# EAGLE board fc-carrier (EAGLE 5.10), part 1 of 2
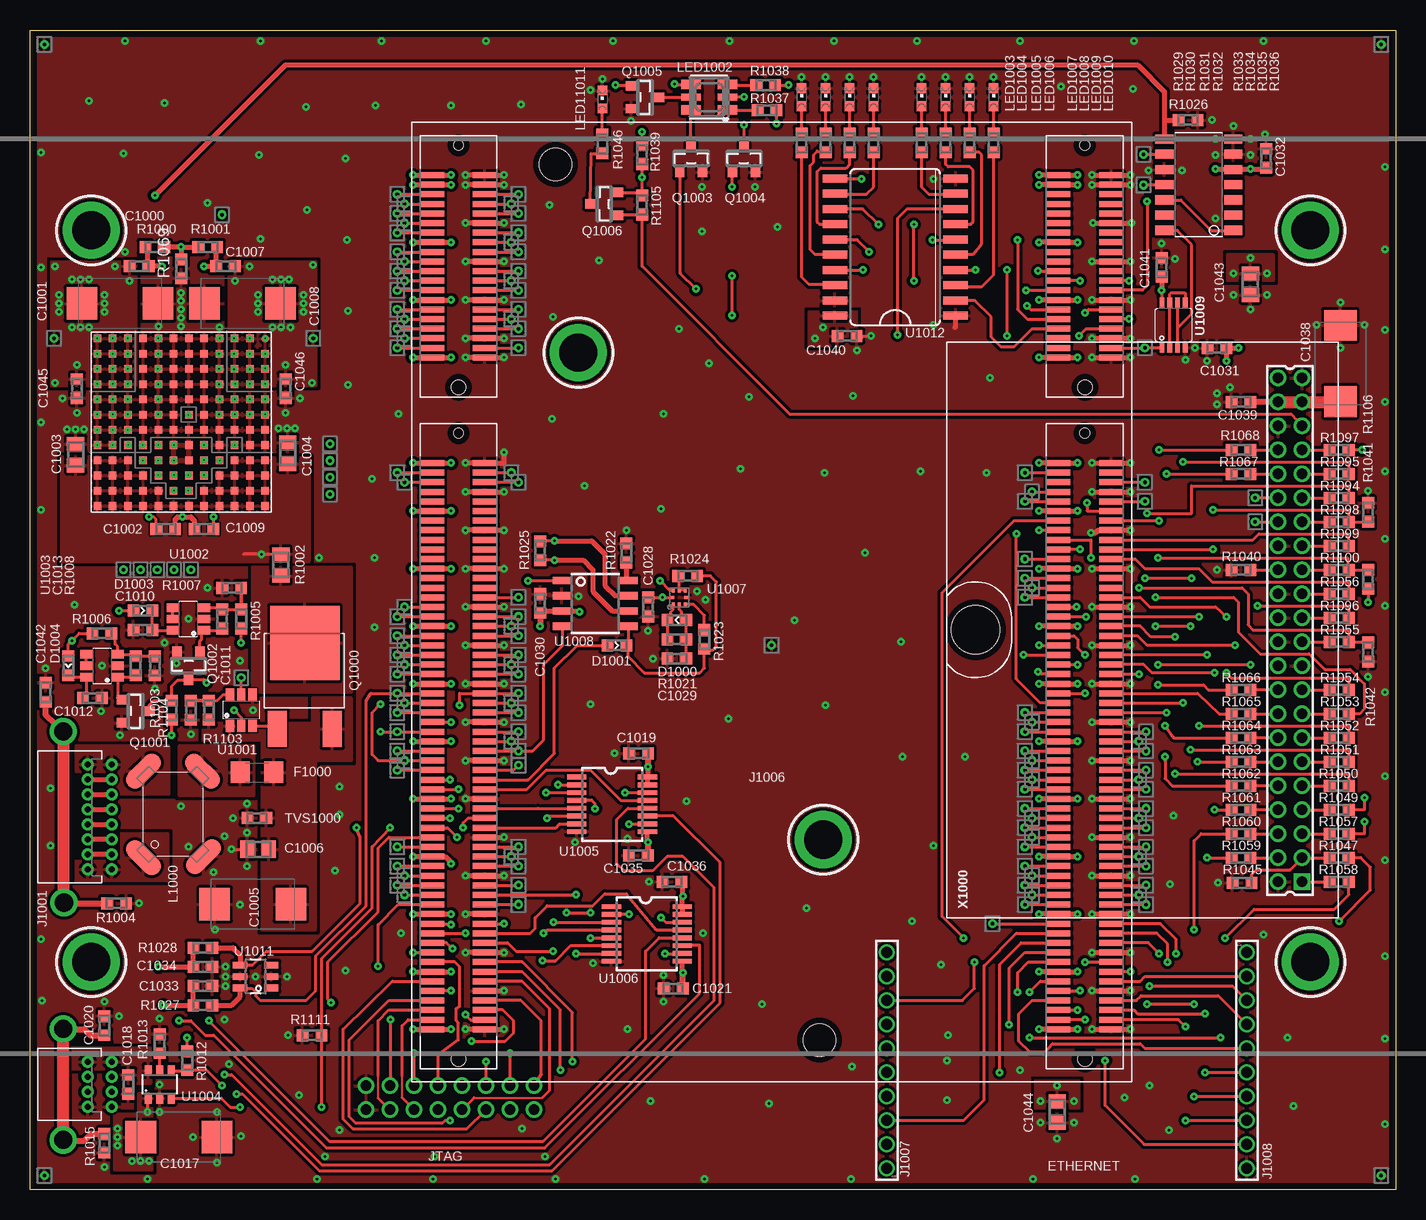
[diagram p0: board, top side]
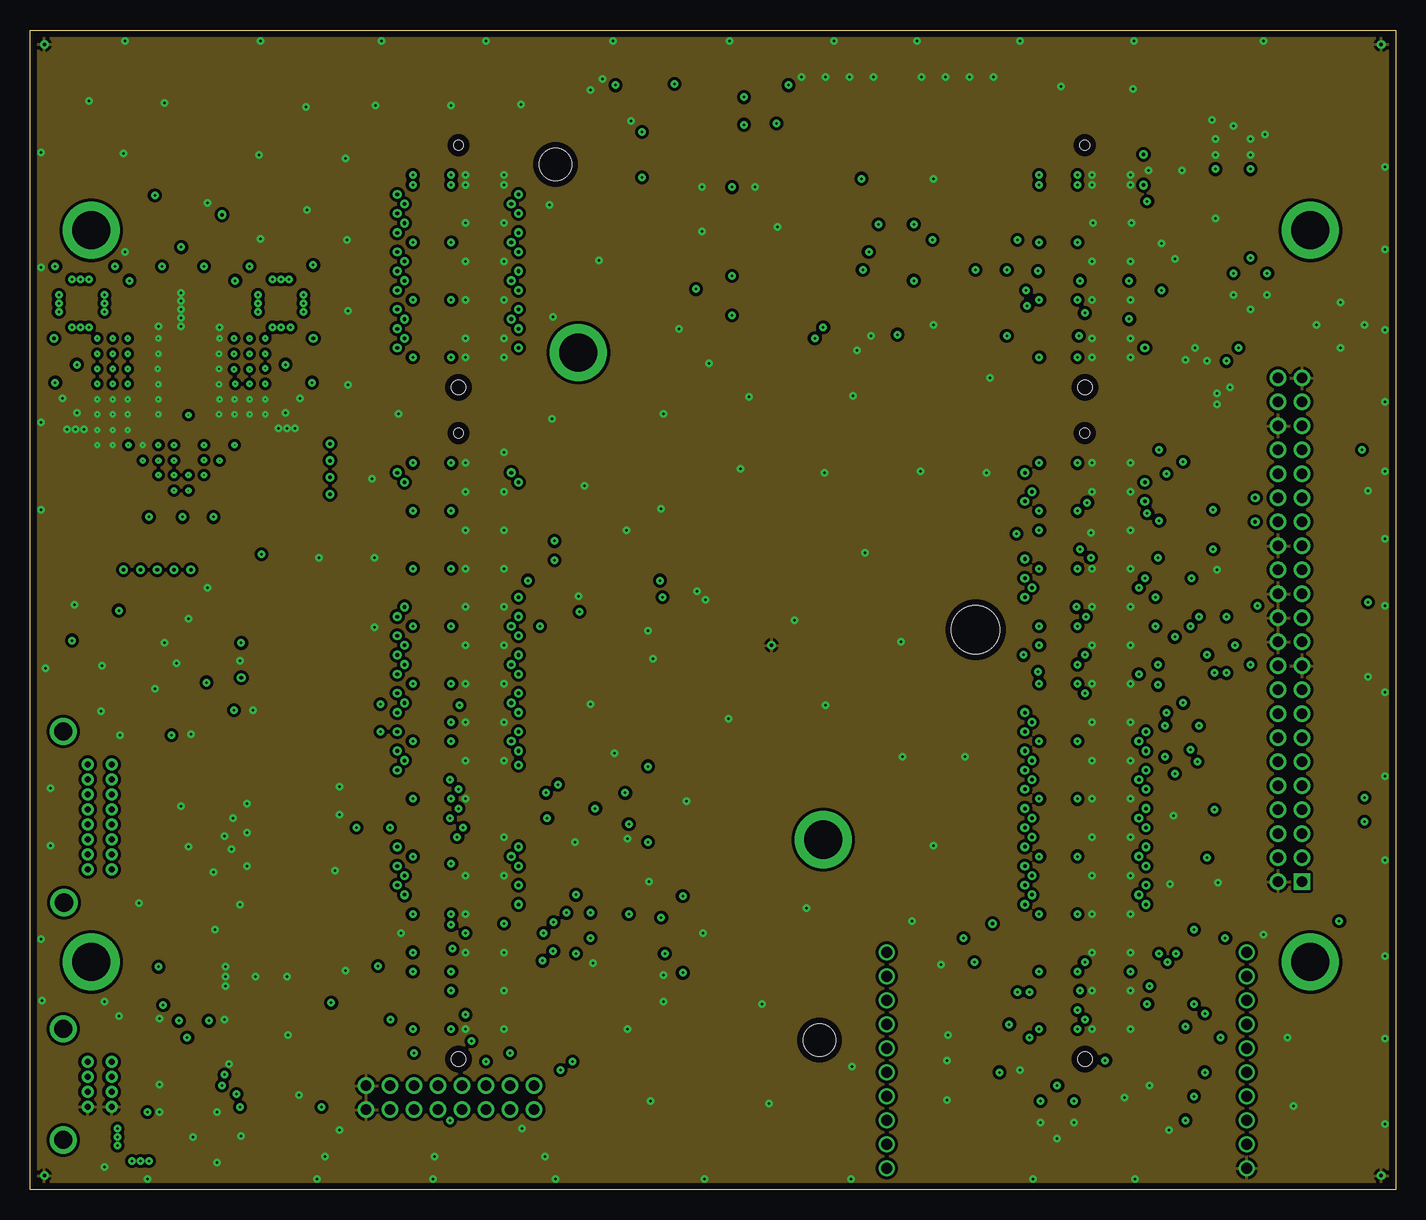
[diagram p1: board, inner layer Route2]
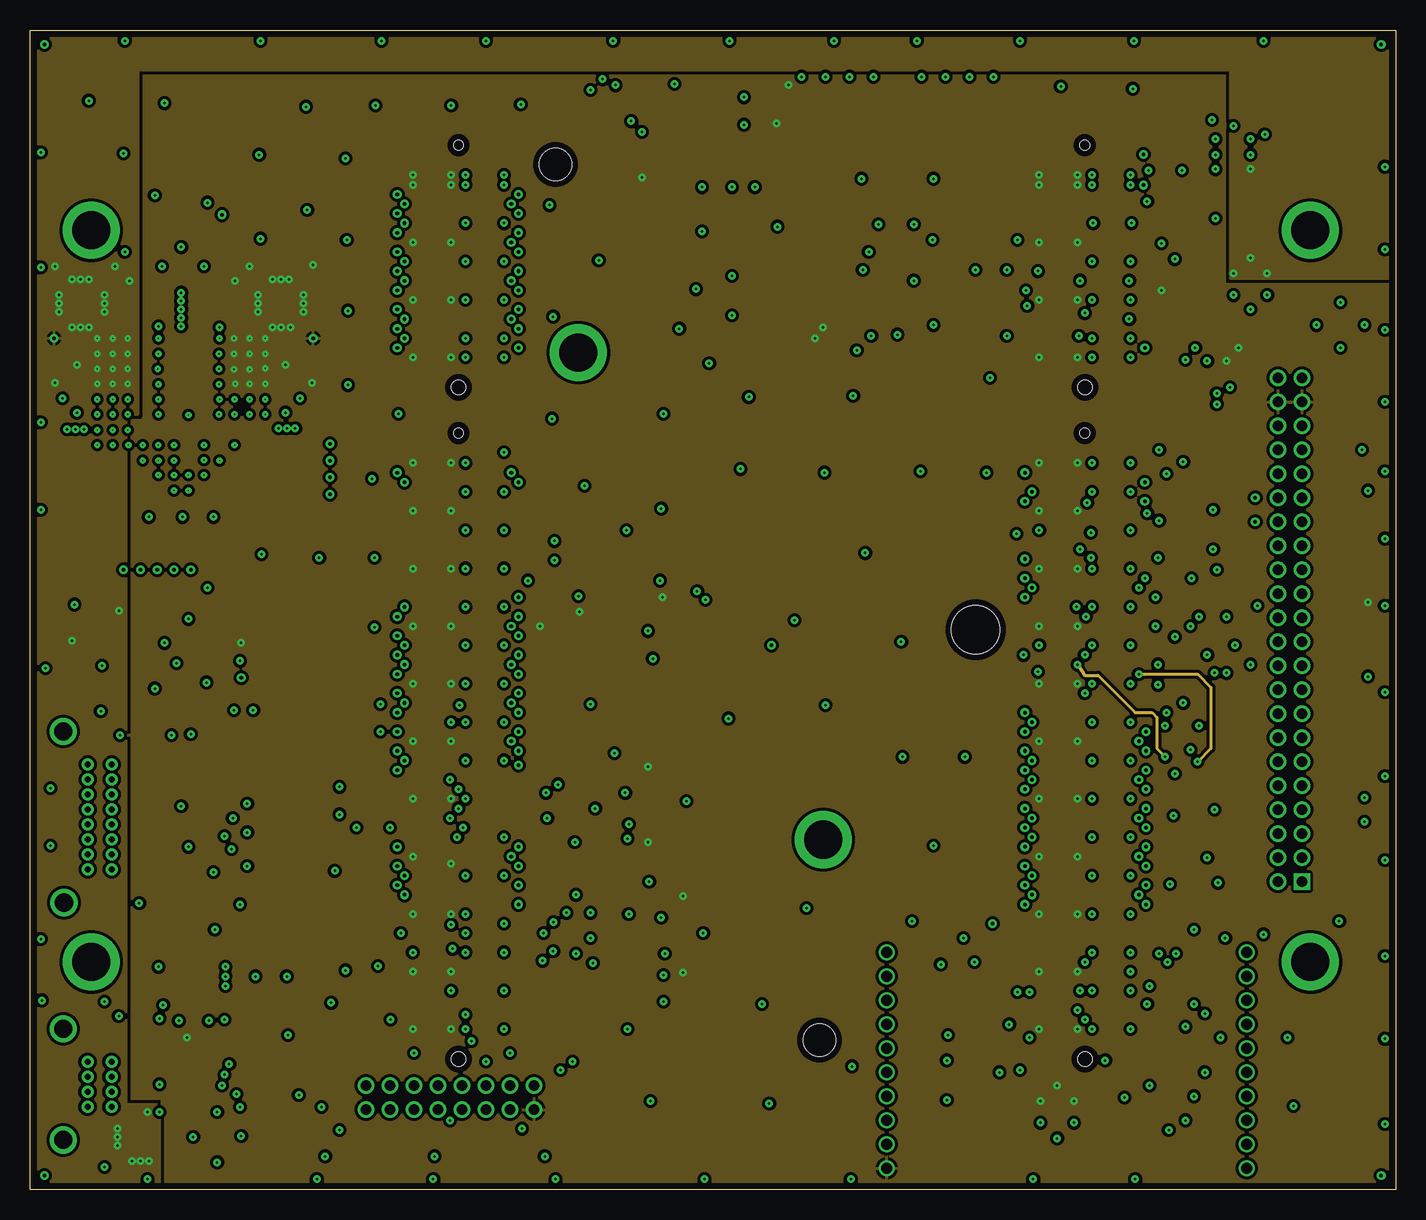
[diagram p2: board, inner layer Route3]
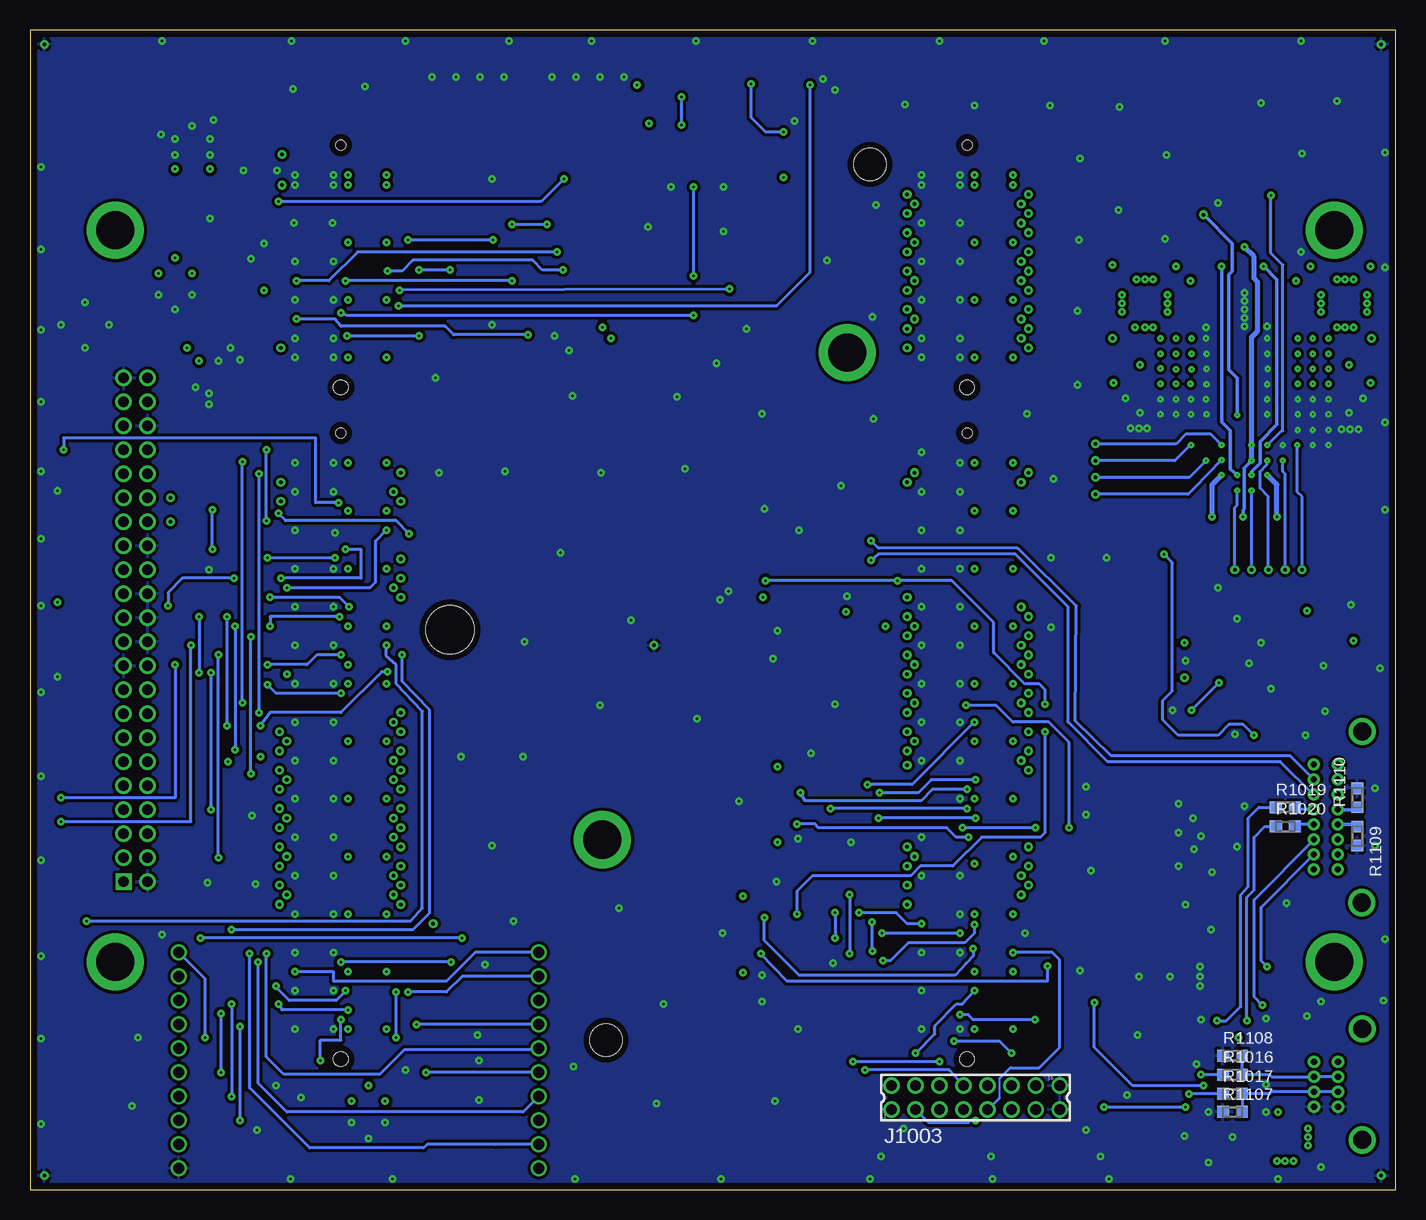
[diagram p3: board, bottom side, seen from below]

Size 113.8 x 96.7 mm. Coordinates in mm from the lower left corner, seen from the top.
Outline: 0,96.7 113.8,96.7 113.8,0 0,0 0,96.7
Copper layers (1+2*3+16): Top 0.0432mm / dielectric 0.3048mm / Route2 0.0356mm / dielectric 0.7112mm / Route3 0.0356mm / dielectric 0.3048mm / Bottom 0.0432mm
Design rules "sunstone_4lr_rules_v1.3_modifid": minimum track width 6mil, minimum drill 8mil, track to track 6mil, track to pad 6mil, pad to pad 6mil, via to via 6mil, smd to smd 6mil, copper to edge 20mil, drill to drill 16mil, minimum pad ring 0.2118mm, minimum via ring 0.2118mm, stop-mask expansion 3mil, vias tented up to drill 0mil, thermal gap 10mil
tRestrict: 10 lines

## Footprints (pad centres in the part's own frame; a part is rotated, then mirrored left to right if it is on the bottom)
0603-B-NOSILK = smd 0.95 x 1: 1 -0.8,0; 2 0.8,0
D/7343-31R = smd 2.55 x 2.7: + 3.175,0; - -3.175,0
0805-B-NOSILK = smd 1.15 x 1.45: 1 -0.9,0; 2 0.9,0
0603-B-NOSILK-DIODE = smd 0.95 x 1: ANODE -0.8,0; CATHODE 0.8,0
1206 = smd 1.6 x 1.8: 1 -1.4,0; 2 1.4,0
ROCKETBUS-PKG = drill 0.508 pad 1.016 round: AUX_1@1 0,-1.875; AUX_1@2 2,-1.875; AUX_2@1 0,-3.125; AUX_2@2 2,-3.125; B+@1 0,4.375; B+@2 2,4.375; B-@1 0,-4.375; B-@2 2,-4.375; CAN_H@1 0,3.125; CAN_H@2 2,3.125; CAN_L@1 0,1.875; CAN_L@2 2,1.875; USB_H@1 0,0.625; USB_H@2 2,0.625; USB_L@1 0,-0.625; USB_L@2 2,-0.625 | drill 1.511 round: CHASSIS@1 -2.032,7.136; CHASSIS@2 -1.982,-7.136
USB-CONNECTOR-PKG = drill 0.508 pad 1.016 round: B+@1 2,1.875; B+@2 0,1.875; B-@7 2,-1.875; B-@8 0,-1.875; USB_H@3 2,0.625; USB_H@4 0,0.625; USB_L@5 2,-0.625; USB_L@6 0,-0.625 | drill 1.511 round: CHASSIS@1 -2.032,4.636; CHASSIS@2 -2.032,-4.636
87758-1616 = drill 0.9 pad 1.27 round: 1 -7,-1; 2 -7,1; 3 -5,-1; 4 -5,1; 5 -3,-1; 6 -3,1; 7 -1,-1; 8 -1,1; 9 1,-1; 10 1,1; 11 3,-1; 12 3,1; 13 5,-1; 14 5,1; 15 7,-1; 16 7,1
TQM = smd 0.5 x 2: X1_1 -35.6,-23.9; X1_2 -35.6,-28.3; X1_3 -34.8,-23.9; X1_4 -34.8,-28.3; X1_5 -34,-23.9; X1_6 -34,-28.3; X1_7 -33.2,-23.9; X1_8 -33.2,-28.3; X1_9 -32.4,-23.9; X1_10 -32.4,-28.3; X1_11 -31.6,-23.9; X1_12 -31.6,-28.3; X1_13 -30.8,-23.9; X1_14 -30.8,-28.3; X1_15 -30,-23.9; X1_16 -30,-28.3; X1_17 -29.2,-23.9; X1_18 -29.2,-28.3; X1_19 -28.4,-23.9; X1_20 -28.4,-28.3; X1_21 -27.6,-23.9; X1_22 -27.6,-28.3; X1_23 -26.8,-23.9; X1_24 -26.8,-28.3; X1_25 -26,-23.9; X1_26 -26,-28.3; X1_27 -25.2,-23.9; X1_28 -25.2,-28.3; X1_29 -24.4,-23.9; X1_30 -24.4,-28.3; X1_31 -23.6,-23.9; X1_32 -23.6,-28.3; X1_33 -22.8,-23.9; X1_34 -22.8,-28.3; X1_35 -22,-23.9; X1_36 -22,-28.3; X1_37 -21.2,-23.9; X1_38 -21.2,-28.3; X1_39 -20.4,-23.9; X1_40 -20.4,-28.3; X1_41 -19.6,-23.9; X1_42 -19.6,-28.3; X1_43 -18.8,-23.9; X1_44 -18.8,-28.3; X1_45 -18,-23.9; X1_46 -18,-28.3; X1_47 -17.2,-23.9; X1_48 -17.2,-28.3; X1_49 -16.4,-23.9; X1_50 -16.4,-28.3; X1_51 -15.6,-23.9; X1_52 -15.6,-28.3; X1_53 -14.8,-23.9; X1_54 -14.8,-28.3; X1_55 -14,-23.9; X1_56 -14,-28.3; X1_57 -13.2,-23.9; X1_58 -13.2,-28.3; X1_59 -12.4,-23.9; X1_60 -12.4,-28.3; X1_61 -11.6,-23.9; X1_62 -11.6,-28.3; X1_63 -10.8,-23.9; X1_64 -10.8,-28.3; X1_65 -10,-23.9; X1_66 -10,-28.3; X1_67 -9.2,-23.9; X1_68 -9.2,-28.3; X1_69 -8.4,-23.9; X1_70 -8.4,-28.3; X1_71 -7.6,-23.9; X1_72 -7.6,-28.3; X1_73 -6.8,-23.9; X1_74 -6.8,-28.3; X1_75 -6,-23.9; X1_76 -6,-28.3; X1_77 -5.2,-23.9; X1_78 -5.2,-28.3; X1_79 -4.4,-23.9; X1_80 -4.4,-28.3; X1_81 -3.6,-23.9; X1_82 -3.6,-28.3; X1_83 -2.8,-23.9; X1_84 -2.8,-28.3; X1_85 -2,-23.9; X1_86 -2,-28.3; X1_87 -1.2,-23.9; X1_88 -1.2,-28.3; X1_89 -0.4,-23.9; X1_90 -0.4,-28.3; X1_91 0.4,-23.9; X1_92 0.4,-28.3; X1_93 1.2,-23.9; X1_94 1.2,-28.3; X1_95 2,-23.9; X1_96 2,-28.3; X1_97 2.8,-23.9; X1_98 2.8,-28.3; X1_99 3.6,-23.9; X1_100 3.6,-28.3; X1_101 4.4,-23.9; X1_102 4.4,-28.3; X1_103 5.2,-23.9; X1_104 5.2,-28.3; X1_105 6,-23.9; X1_106 6,-28.3; X1_107 6.8,-23.9; X1_108 6.8,-28.3; X1_109 7.6,-23.9; X1_110 7.6,-28.3; X1_111 8.4,-23.9; X1_112 8.4,-28.3; X1_113 9.2,-23.9; X1_114 9.2,-28.3; X1_115 10,-23.9; X1_116 10,-28.3; X1_117 10.8,-23.9; X1_118 10.8,-28.3; X1_119 11.6,-23.9; X1_120 11.6,-28.3; X2_1 20.4,-23.9; X2_2 20.4,-28.3; X2_3 21.2,-23.9; X2_4 21.2,-28.3; X2_5 22,-23.9; X2_6 22,-28.3; X2_7 22.8,-23.9; X2_8 22.8,-28.3; X2_9 23.6,-23.9; X2_10 23.6,-28.3; X2_11 24.4,-23.9; X2_12 24.4,-28.3; X2_13 25.2,-23.9; X2_14 25.2,-28.3; X2_15 26,-23.9; X2_16 26,-28.3; X2_17 26.8,-23.9; X2_18 26.8,-28.3; X2_19 27.6,-23.9; X2_20 27.6,-28.3; X2_21 28.4,-23.9; X2_22 28.4,-28.3; X2_23 29.2,-23.9; X2_24 29.2,-28.3; X2_25 30,-23.9; X2_26 30,-28.3; X2_27 30.8,-23.9; X2_28 30.8,-28.3; X2_29 31.6,-23.9; X2_30 31.6,-28.3; X2_31 32.4,-23.9; X2_32 32.4,-28.3; X2_33 33.2,-23.9; X2_34 33.2,-28.3; X2_35 34,-23.9; X2_36 34,-28.3; X2_37 34.8,-23.9; X2_38 34.8,-28.3; X2_39 35.6,-23.9; X2_40 35.6,-28.3; X3_1 -35.6,28.3; X3_2 -35.6,23.9; X3_3 -34.8,28.3; X3_4 -34.8,23.9; X3_5 -34,28.3; X3_6 -34,23.9; X3_7 -33.2,28.3; X3_8 -33.2,23.9; X3_9 -32.4,28.3; X3_10 -32.4,23.9; X3_11 -31.6,28.3; X3_12 -31.6,23.9; X3_13 -30.8,28.3; X3_14 -30.8,23.9; X3_15 -30,28.3; X3_16 -30,23.9; X3_17 -29.2,28.3; X3_18 -29.2,23.9; X3_19 -28.4,28.3; X3_20 -28.4,23.9; X3_21 -27.6,28.3; X3_22 -27.6,23.9; X3_23 -26.8,28.3; X3_24 -26.8,23.9; X3_25 -26,28.3; X3_26 -26,23.9; X3_27 -25.2,28.3; X3_28 -25.2,23.9; X3_29 -24.4,28.3; X3_30 -24.4,23.9; X3_31 -23.6,28.3; X3_32 -23.6,23.9; X3_33 -22.8,28.3; X3_34 -22.8,23.9; X3_35 -22,28.3; X3_36 -22,23.9; X3_37 -21.2,28.3; X3_38 -21.2,23.9; X3_39 -20.4,28.3; X3_40 -20.4,23.9; X3_41 -19.6,28.3; X3_42 -19.6,23.9; X3_43 -18.8,28.3; X3_44 -18.8,23.9; X3_45 -18,28.3; X3_46 -18,23.9; X3_47 -17.2,28.3; X3_48 -17.2,23.9; X3_49 -16.4,28.3; X3_50 -16.4,23.9; X3_51 -15.6,28.3; X3_52 -15.6,23.9; X3_53 -14.8,28.3; X3_54 -14.8,23.9; X3_55 -14,28.3; X3_56 -14,23.9; X3_57 -13.2,28.3; X3_58 -13.2,23.9; X3_59 -12.4,28.3; X3_60 -12.4,23.9; X3_61 -11.6,28.3; X3_62 -11.6,23.9; X3_63 -10.8,28.3; X3_64 -10.8,23.9; X3_65 -10,28.3; X3_66 -10,23.9; X3_67 -9.2,28.3; X3_68 -9.2,23.9; X3_69 -8.4,28.3; X3_70 -8.4,23.9; X3_71 -7.6,28.3; X3_72 -7.6,23.9; X3_73 -6.8,28.3; X3_74 -6.8,23.9; X3_75 -6,28.3; X3_76 -6,23.9; X3_77 -5.2,28.3; X3_78 -5.2,23.9; X3_79 -4.4,28.3; X3_80 -4.4,23.9; X3_81 -3.6,28.3; X3_82 -3.6,23.9; X3_83 -2.8,28.3; X3_84 -2.8,23.9; X3_85 -2,28.3; X3_86 -2,23.9; X3_87 -1.2,28.3; X3_88 -1.2,23.9; X3_89 -0.4,28.3; X3_90 -0.4,23.9; X3_91 0.4,28.3; X3_92 0.4,23.9; X3_93 1.2,28.3; X3_94 1.2,23.9; X3_95 2,28.3; X3_96 2,23.9; X3_97 2.8,28.3; X3_98 2.8,23.9; X3_99 3.6,28.3; X3_100 3.6,23.9; X3_101 4.4,28.3; X3_102 4.4,23.9; X3_103 5.2,28.3; X3_104 5.2,23.9; X3_105 6,28.3; X3_106 6,23.9; X3_107 6.8,28.3; X3_108 6.8,23.9; X3_109 7.6,28.3; X3_110 7.6,23.9; X3_111 8.4,28.3; X3_112 8.4,23.9; X3_113 9.2,28.3; X3_114 9.2,23.9; X3_115 10,28.3; X3_116 10,23.9; X3_117 10.8,28.3; X3_118 10.8,23.9; X3_119 11.6,28.3; X3_120 11.6,23.9; X4_1 20.4,28.3; X4_2 20.4,23.9; X4_3 21.2,28.3; X4_4 21.2,23.9; X4_5 22,28.3; X4_6 22,23.9; X4_7 22.8,28.3; X4_8 22.8,23.9; X4_9 23.6,28.3; X4_10 23.6,23.9; X4_11 24.4,28.3; X4_12 24.4,23.9; X4_13 25.2,28.3; X4_14 25.2,23.9; X4_15 26,28.3; X4_16 26,23.9; X4_17 26.8,28.3; X4_18 26.8,23.9; X4_19 27.6,28.3; X4_20 27.6,23.9; X4_21 28.4,28.3; X4_22 28.4,23.9; X4_23 29.2,28.3; X4_24 29.2,23.9; X4_25 30,28.3; X4_26 30,23.9; X4_27 30.8,28.3; X4_28 30.8,23.9; X4_29 31.6,28.3; X4_30 31.6,23.9; X4_31 32.4,28.3; X4_32 32.4,23.9; X4_33 33.2,28.3; X4_34 33.2,23.9; X4_35 34,28.3; X4_36 34,23.9; X4_37 34.8,28.3; X4_38 34.8,23.9; X4_39 35.6,28.3; X4_40 35.6,23.9 | hole 1.2: 17.9,-26.1; 17.9,26.1; -38.1,-26.1; -38.1,26.1 | hole 0.8: 38.1,-26.1; 38.1,26.1; 14.1,-26.1; 14.1,26.1 | hole 2.7: -36.5,-4; 36.5,18
1_10_CON = drill 0.9 pad 1.27 round: 1 -9,0; 2 -7,0; 3 -5,0; 4 -3,0; 5 -1,0; 6 1,0; 7 3,0; 8 5,0; 9 7,0; 10 9,0
CMS1 = smd 3.5 x 1.5 rotated 45: 1 3.608,-2.462; 3 -3.608,2.462 | smd 3.5 x 1.5 rotated 315: 2 3.508,2.562; 4 -3.608,-2.462
PLCC-6 = smd 1.65 x 0.8: 1 -1.525,1.05; 3 -1.525,-1.05; 4 1.525,-1.05; 6 1.525,1.05 | smd 1.65 x 0.6: 2 -1.525,0; 5 1.525,0
CHIPLED_0603 = smd 0.8 x 0.8: A 0,-0.75; C 0,0.75
#4/.225-PAD+HEAD_OR_SMALL_NUT = drill 3.175 round: MT 0,0
DPAK-ZETEX = smd 6.2 x 5.8: DRAIN 0,0 | smd 3 x 1.6: GATE 7.18,-2.29; SOURCE 7.18,2.29
SOT23 = smd 0.787 x 0.889: 1 -0.953,-1.143; 2 0.953,-1.143; 3 0,1.143
TEST = drill 0.3 round: P$1 0,0
LT4619 = smd 0.63 x 0.63: A1 -6.985,-6.985; A2 -5.715,-6.985; A3 -4.445,-6.985; A4 -3.175,-6.985; A5 -1.905,-6.985; A6 -0.635,-6.985; A7 0.635,-6.985; A8 1.905,-6.985; A9 3.175,-6.985; A10 4.445,-6.985; A11 5.715,-6.985; A12 6.985,-6.985; B1 -6.985,-5.715; B2 -5.715,-5.715; B3 -4.445,-5.715; B4 -3.175,-5.715; B5 -1.905,-5.715; B6 -0.635,-5.715; B7 0.635,-5.715; B8 1.905,-5.715; B9 3.175,-5.715; B10 4.445,-5.715; B11 5.715,-5.715; B12 6.985,-5.715; C1 -6.985,-4.445; C2 -5.715,-4.445; C3 -4.445,-4.445; C4 -3.175,-4.445; C5 -1.905,-4.445; C6 -0.635,-4.445; C7 0.635,-4.445; C8 1.905,-4.445; C9 3.175,-4.445; C10 4.445,-4.445; C11 5.715,-4.445; C12 6.985,-4.445; D1 -6.985,-3.175; D2 -5.715,-3.175; D3 -4.445,-3.175; D4 -3.175,-3.175; D5 -1.905,-3.175; D6 -0.635,-3.175; D7 0.635,-3.175; D8 1.905,-3.175; D9 3.175,-3.175; D10 4.445,-3.175; D11 5.715,-3.175; D12 6.985,-3.175; E1 -6.985,-1.905; E2 -5.715,-1.905; E3 -4.445,-1.905; E4 -3.175,-1.905; E5 -1.905,-1.905; E6 -0.635,-1.905; E7 0.635,-1.905; E8 1.905,-1.905; E9 3.175,-1.905; E10 4.445,-1.905; E11 5.715,-1.905; E12 6.985,-1.905; F1 -6.985,-0.635; F2 -5.715,-0.635; F3 -4.445,-0.635; F4 -3.175,-0.635; F5 -1.905,-0.635; F6 -0.635,-0.635; F7 0.635,-0.635; F8 1.905,-0.635; F9 3.175,-0.635; F10 4.445,-0.635; F11 5.715,-0.635; F12 6.985,-0.635; G1 -6.985,0.635; G2 -5.715,0.635; G3 -4.445,0.635; G4 -3.175,0.635; G5 -1.905,0.635; G6 -0.635,0.635; G7 0.635,0.635; G8 1.905,0.635; G9 3.175,0.635; G10 4.445,0.635; G11 5.715,0.635; G12 6.985,0.635; H1 -6.985,1.905; H2 -5.715,1.905; H3 -4.445,1.905; H4 -3.175,1.905; H5 -1.905,1.905; H6 -0.635,1.905; H7 0.635,1.905; H8 1.905,1.905; H9 3.175,1.905; H10 4.445,1.905; H11 5.715,1.905; H12 6.985,1.905; J1 -6.985,3.175; J2 -5.715,3.175; J3 -4.445,3.175; J4 -3.175,3.175; J5 -1.905,3.175; J6 -0.635,3.175; J7 0.635,3.175; J8 1.905,3.175; J9 3.175,3.175; J10 4.445,3.175; J11 5.715,3.175; J12 6.985,3.175; K1 -6.985,4.445; K2 -5.715,4.445; K3 -4.445,4.445; K4 -3.175,4.445; K5 -1.905,4.445; K6 -0.635,4.445; K7 0.635,4.445; K8 1.905,4.445; K9 3.175,4.445; K10 4.445,4.445; K11 5.715,4.445; K12 6.985,4.445; L1 -6.985,5.715; L2 -5.715,5.715; L3 -4.445,5.715; L4 -3.175,5.715; L5 -1.905,5.715; L6 -0.635,5.715; L7 0.635,5.715; L8 1.905,5.715; L9 3.175,5.715; L10 4.445,5.715; L11 5.715,5.715; L12 6.985,5.715; M1 -6.985,6.985; M2 -5.715,6.985; M3 -4.445,6.985; M4 -3.175,6.985; M5 -1.905,6.985; M6 -0.635,6.985; M7 0.635,6.985; M8 1.905,6.985; M9 3.175,6.985; M10 4.445,6.985; M11 5.715,6.985; M12 6.985,6.985
SOT23-6 = smd 0.7 x 1: 1 -0.95,-1.3; 2 0,-1.3; 3 0.95,-1.3; 4 0.95,1.3; 5 0,1.3; 6 -0.95,1.3
USB_PWR_SWT_SOP = smd 0.6 x 0.9: 1 -0.938,-1.151; 2 0.012,-1.151; 3 0.962,-1.151; 4 0.962,1.149; 5 0.012,1.149; 6 -0.938,1.149
USB_TRANCEIVER = smd 0.4 x 1.6: 1 -2.225,-2.85; 2 -1.575,-2.85; 3 -0.925,-2.85; 4 -0.275,-2.85; 5 0.375,-2.85; 6 1.025,-2.85; 7 1.675,-2.85; 8 2.325,-2.85; 9 2.325,3.05; 10 1.675,3.05; 11 1.025,3.05; 12 0.375,3.05; 13 -0.275,3.05; 14 -0.925,3.05; 15 -1.575,3.05; 16 -2.225,3.05
MICROPAK-8 = smd 0.25 x 0.4: 1 -0.5,-0.61; 2 0,-0.61; 3 0.5,-0.61; 5 0.5,0.61; 6 0,0.61; 7 -0.5,0.61 | smd 0.4 x 0.25: 4 0.6,0; 8 -0.6,0
DR-PDSO-G8 = smd 0.6 x 1.5: 1 -1.905,-2.8; 2 -0.635,-2.8; 3 0.635,-2.8; 4 1.905,-2.8; 5 1.905,2.8; 6 0.635,2.8; 7 -0.635,2.8; 8 -1.905,2.8
DCT-SSOP = smd 0.4 x 0.8: 1 -0.975,-1.875; 2 -0.325,-1.875; 3 0.325,-1.875; 4 0.975,-1.875; 5 0.975,1.875; 6 0.325,1.875; 7 -0.325,1.875; 8 -0.975,1.875
TI-D-SSOIC = smd 0.76 x 1.52: 1 -3.81,-2.86; 2 -2.54,-2.86; 3 -1.27,-2.86; 4 0,-2.86; 5 1.27,-2.86; 6 2.54,-2.86; 7 3.81,-2.86; 8 3.81,2.86; 9 2.54,2.86; 10 1.27,2.86; 11 0,2.86; 12 -1.27,2.86; 13 -2.54,2.86; 14 -3.81,2.86
SOT23-6L = smd 0.55 x 1.2: 1 -0.95,-1.3; 2 0,-1.3; 3 0.95,-1.3; 4 0.95,1.3; 5 0,1.3; 6 -0.95,1.3
SO20W = smd 0.66 x 2.032: 1 -5.715,-5.029; 2 -4.445,-5.029; 3 -3.175,-5.029; 4 -1.905,-5.029; 5 -0.635,-5.029; 6 0.635,-5.029; 7 1.905,-5.029; 8 3.175,-5.029; 9 4.445,-5.029; 10 5.715,-5.029; 11 5.715,5.029; 12 4.445,5.029; 13 3.175,5.029; 14 1.905,5.029; 15 0.635,5.029; 16 -0.635,5.029; 17 -1.905,5.029; 18 -3.175,5.029; 19 -4.445,5.029; 20 -5.715,5.029
IDE_CON_P = drill 0.9 pad 1.27 square: 1 0,0 | drill 0.9 pad 1.27 round: 2 0,2; 3 2,0; 4 2,2; 5 4,0; 6 4,2; 7 6,0; 8 6,2; 9 8,0; 10 8,2; 11 10,0; 12 10,2; 13 12,0; 14 12,2; 15 14,0; 16 14,2; 17 16,0; 18 16,2; 19 18,0; 20 18,2; 21 20,0; 22 20,2; 23 22,0; 24 22,2; 25 24,0; 26 24,2; 27 26,0; 28 26,2; 29 28,0; 30 28,2; 31 30,0; 32 30,2; 33 32,0; 34 32,2; 35 34,0; 36 34,2; 37 36,0; 38 36,2; 39 38,0; 40 38,2; 41 40,0; 42 40,2; 43 42,0; 44 42,2 | hole 4: 21,27.2

## Placement (x,y rotation side)
C1000  22p  [0603-B-NOSILK]  9.1,77 180 top
C1001  100u  [D/7343-31R]  7.5,73.9 180 top
C1002  200p  [0603-B-NOSILK]  11.3,55.1 0 top
C1003  10u  [0805-B-NOSILK]  3.8,61.3 90 top
C1004  10u  [0805-B-NOSILK]  21.48,61.42 90 top
C1005  22u  [D/7343-31R]  18.56,23.81 0 top
C1006  330n  [0805-B-NOSILK]  19,28.4 0 top
C1007  22p  [0603-B-NOSILK]  16.3,77 180 top
C1008  100u  [D/7343-31R]  17.7,73.9 0 top
C1009  200p  [0603-B-NOSILK]  14.5,55.1 180 top
C1010  2.7u  [0603-B-NOSILK]  9.4,46.7 0 top
C1011  15n  [0603-B-NOSILK]  16,47.6 270 top
C1012  2.7u  [0603-B-NOSILK]  5.2,41 180 top
C1013  15n  [0603-B-NOSILK]  8.8,43.7 270 top
C1017  100u  [D/7343-31R]  12.4,4.4 180 top
C1018  100n  [0603-B-NOSILK]  8.2,8.8 270 top
C1019  100n  [0603-B-NOSILK]  50.7,36.4 0 top
C1020  NP  [0603-B-NOSILK]  6.2,13.7 90 top
C1021  100n  [0603-B-NOSILK]  53.6,16.8 0 top
C1028  100n  [0603-B-NOSILK]  51.5,48.6 270 top
C1029  82n  [0603-B-NOSILK]  53.9,44.3 180 top
C1030  100n  [0603-B-NOSILK]  42.5,48.9 90 top
C1031  100n  [0603-B-NOSILK]  98.9,70.2 0 top
C1032  100n  [0603-B-NOSILK]  103,86 270 top
C1033  NP  [0603-B-NOSILK]  14.4,17 180 top
C1034  NP  [0603-B-NOSILK]  14.4,18.6 180 top
C1035  100n  [0603-B-NOSILK]  50.7,27.9 180 top
C1036  100n  [0603-B-NOSILK]  53.5,25.7 180 top
C1038  100u  [D/7343-31R]  109.2,68.9 270 top
C1039  100n  [0603-B-NOSILK]  100.9,65.7 0 top
C1040  100n  [0603-B-NOSILK]  68.09,71.2 0 top
C1041  100n  [0603-B-NOSILK]  94.3,76.9 270 top
C1042  100n  [0603-B-NOSILK]  1.3,41.5 90 top
C1043  10u  [0805-B-NOSILK]  101.7,75.5 270 top
C1044  10u  [0805-B-NOSILK]  85.6,6.5 270 top
C1045  15n  [0603-B-NOSILK]  3.9,66.8 270 top
C1046  15n  [0603-B-NOSILK]  21.3,66.8 270 top
D1000  DIODE-0603  [0603-B-NOSILK-DIODE]  53.9,47.5 180 top
D1001  DIODE-0603  [0603-B-NOSILK-DIODE]  48.9,45.4 0 top
D1003  DIODE-0603  [0603-B-NOSILK-DIODE]  9.4,48.3 0 top
D1004  DIODE-0603  [0603-B-NOSILK-DIODE]  3.2,43.7 270 top
F1000  2.0A Fast  [1206]  18.92,34.82 0 top
J1001  ROCKETBUS  [ROCKETBUS-PKG]  4.81,31.09 0 top
J1002  PSAS-USB-CONNECTOR  [USB-CONNECTOR-PKG]  4.8,8.8 0 top
J1003  87758-1616  [87758-1616]  35,7.7 0 bottom
J1006  TQM  [TQM]  61.8,49 90 top
J1007  1_10_CON  [1_10_CON]  71.4,10.8 90 top
J1008  1_10_CON  [1_10_CON]  101.4,10.8 270 top
L1000  CMS1  [CMS1]  11.9,31.3 270 top
LED1002  RGB  [PLCC-6]  56.6,91.1 180 top
LED1003  RED  [CHIPLED_0603]  64.3,91.1 0 top
LED1004  RED  [CHIPLED_0603]  66.3,91.1 0 top
LED1005  RED  [CHIPLED_0603]  68.3,91.1 0 top
LED1006  RED  [CHIPLED_0603]  70.3,91.1 0 top
LED1007  RED  [CHIPLED_0603]  74.3,91.1 0 top
LED1008  RED  [CHIPLED_0603]  76.3,91.1 0 top
LED1009  RED  [CHIPLED_0603]  78.3,91.1 0 top
LED1010  RED  [CHIPLED_0603]  80.3,91.1 0 top
LED11011  GRN  [CHIPLED_0603]  47.7,90.9 0 top
MT1  #4-PLATED_MOUNTING_HOLE-P/.300  [#4/.225-PAD+HEAD_OR_SMALL_NUT]  45.7,69.8 0 top
MT2  #4-PLATED_MOUNTING_HOLE-P/.300  [#4/.225-PAD+HEAD_OR_SMALL_NUT]  66.1,29.2 0 top
MT3  #4-PLATED_MOUNTING_HOLE-P/.300  [#4/.225-PAD+HEAD_OR_SMALL_NUT]  106.7,19 270 top
MT4  #4-PLATED_MOUNTING_HOLE-P/.300  [#4/.225-PAD+HEAD_OR_SMALL_NUT]  106.7,80 270 top
MT5  #4-PLATED_MOUNTING_HOLE-P/.300  [#4/.225-PAD+HEAD_OR_SMALL_NUT]  5.1,19 270 top
MT6  #4-PLATED_MOUNTING_HOLE-P/.300  [#4/.225-PAD+HEAD_OR_SMALL_NUT]  5.1,80 270 top
Q1000  ZXMP6A17K  [DPAK-ZETEX]  22.9,45.6 270 top
Q1001  PMV45EN  [SOT23]  8.8,39.9 270 top
Q1002  PMV45EN  [SOT23]  13.2,43.7 180 top
Q1003  PMV45EN  [SOT23]  55.1,86 0 top
Q1004  PMV45EN  [SOT23]  59.5,86 0 top
Q1005  PMV45EN  [SOT23]  51.25,91.09 270 top
Q1006  NTR4101P  [SOT23]  47.85,82.2 90 top
R1000  11.5k  [0603-B-NOSILK]  10.4,78.6 180 top
R1001  19.1k  [0603-B-NOSILK]  14.8,78.6 0 top
R1002  0.06  [0805-B-NOSILK]  20.9,52.1 90 top
R1003  1K  [0603-B-NOSILK]  11.8,40 270 top
R1004  100k  [0603-B-NOSILK]  7.2,23.9 0 top
R1005  19.1k  [0603-B-NOSILK]  17.6,47.6 270 top
R1006  34k  [0603-B-NOSILK]  6,46.4 180 top
R1007  10k  [0603-B-NOSILK]  16.8,50.2 0 top
R1008  10k  [0603-B-NOSILK]  10.4,43.7 90 top
R1012  10k  [0603-B-NOSILK]  13.1,10.8 90 top
R1013  57.6k  [0603-B-NOSILK]  10.8,12.2 90 top
R1015  0  [0603-B-NOSILK]  6.2,3.9 90 top
R1016  33  [0603-B-NOSILK]  13.6,9.6 0 bottom
R1017  33  [0603-B-NOSILK]  13.6,8 0 bottom
R1019  33  [0603-B-NOSILK]  9.2,31.9 0 bottom
R1020  33  [0603-B-NOSILK]  9.2,30.3 0 bottom
R1021  10k  [0603-B-NOSILK]  53.9,45.9 180 top
R1022  18k  [0603-B-NOSILK]  49.7,53.1 270 top
R1023  3.3k  [0603-B-NOSILK]  56.2,45.9 90 top
R1024  NP  [0603-B-NOSILK]  54.8,51.2 0 top
R1025  NP  [0603-B-NOSILK]  42.5,53.3 90 top
R1026  100k  [0603-B-NOSILK]  96.5,89.2 0 top
R1027  0  [0603-B-NOSILK]  14.4,15.4 180 top
R1028  0  [0603-B-NOSILK]  14.4,20.2 180 top
R1029  470  [0603-B-NOSILK]  64.3,87.3 90 top
R1030  470  [0603-B-NOSILK]  66.3,87.3 90 top
R1031  470  [0603-B-NOSILK]  68.3,87.3 90 top
R1032  470  [0603-B-NOSILK]  70.3,87.3 90 top
R1033  470  [0603-B-NOSILK]  74.3,87.3 90 top
R1034  470  [0603-B-NOSILK]  76.3,87.3 90 top
R1035  470  [0603-B-NOSILK]  78.3,87.3 90 top
R1036  470  [0603-B-NOSILK]  80.3,87.3 90 top
R1037  2.32k  [0603-B-NOSILK]  61.4,90 0 top
R1038  2.32k  [0603-B-NOSILK]  61.3,92.1 0 top
R1039  3.83k  [0603-B-NOSILK]  51,86.3 270 top
R1040  82  [0603-B-NOSILK]  100.9,51.7 0 top
R1041  4.7K  [0603-B-NOSILK]  111.5,50.9 270 top
R1042  10k  [0603-B-NOSILK]  111.5,44.85 90 top
R1045  10k  [0603-B-NOSILK]  101,25.6 0 top
R1046  470  [0603-B-NOSILK]  47.7,87.2 270 top
R1047  33  [0603-B-NOSILK]  109.1,25.7 0 top
R1049  33  [0603-B-NOSILK]  109.1,31.7 0 top
R1050  33  [0603-B-NOSILK]  109.1,33.7 0 top
R1051  33  [0603-B-NOSILK]  109.1,35.7 0 top
R1052  33  [0603-B-NOSILK]  109.1,37.7 0 top
R1053  33  [0603-B-NOSILK]  109.1,39.7 0 top
R1054  33  [0603-B-NOSILK]  109.1,41.7 0 top
R1055  82  [0603-B-NOSILK]  109.1,45.7 0 top
R1056  22  [0603-B-NOSILK]  109.1,47.7 0 top
R1057  33  [0603-B-NOSILK]  109.1,29.7 180 top
R1058  33  [0603-B-NOSILK]  109.1,27.7 180 top
R1059  33  [0603-B-NOSILK]  100.9,27.7 0 top
R1060  33  [0603-B-NOSILK]  100.9,29.7 0 top
R1061  33  [0603-B-NOSILK]  100.9,31.7 0 top
R1062  33  [0603-B-NOSILK]  100.9,33.7 0 top
R1063  33  [0603-B-NOSILK]  100.9,35.7 0 top
R1064  33  [0603-B-NOSILK]  100.9,37.7 0 top
R1065  33  [0603-B-NOSILK]  100.9,39.7 0 top
R1066  33  [0603-B-NOSILK]  100.9,41.7 0 top
R1067  33  [0603-B-NOSILK]  100.9,59.7 0 top
R1068  33  [0603-B-NOSILK]  100.9,61.7 0 top
R1069  0  [0603-B-NOSILK]  12.6,76.8 90 top
R1094  33  [0603-B-NOSILK]  109.1,57.7 180 top
R1095  33  [0603-B-NOSILK]  109.1,59.7 180 top
R1096  22  [0603-B-NOSILK]  109.1,49.7 180 top
R1097  33  [0603-B-NOSILK]  109.1,61.7 180 top
R1098  82  [0603-B-NOSILK]  109.1,55.7 0 top
R1099  22  [0603-B-NOSILK]  109.1,53.7 0 top
R1100  82  [0603-B-NOSILK]  109.1,51.7 0 top
R1103  61.9k  [0603-B-NOSILK]  14.9,40 270 top
R1104  10k  [0603-B-NOSILK]  13.4,40 90 top
R1105  100k  [0603-B-NOSILK]  51,82.1 270 top
R1106  10k  [0603-B-NOSILK]  111.5,56.48 270 top
R1107  15k  [0603-B-NOSILK]  13.6,6.5 0 bottom
R1108  15k  [0603-B-NOSILK]  13.6,11.2 0 bottom
R1109  15k  [0603-B-NOSILK]  3.2,29.5 270 bottom
R1110  15k  [0603-B-NOSILK]  3.2,32.7 90 bottom
R1111  10k  [0603-B-NOSILK]  23.5,12.9 0 top
TP1000  TEST  [TEST]  10.6,51.7 180 top
TP1001  TEST  [TEST]  25,59.4 180 top
TP1002  TEST  [TEST]  16,81.3 0 top
TP1003  TEST  [TEST]  12,51.7 180 top
TP1004  TEST  [TEST]  9.2,51.7 180 top
TP1005  TEST  [TEST]  13.4,51.7 180 top
TP1007  TEST  [TEST]  25,58 180 top
TP1008  TEST  [TEST]  17.6,42.7 0 top
TP1009  TEST  [TEST]  25,62.2 0 top
TP1010  TEST  [TEST]  25,60.8 0 top
TP1011  TEST  [TEST]  7.8,51.7 180 top
TP1015  TEST  [TEST]  83.5,34.2 270 top
TP1017  TEST  [TEST]  30.6,38.2 270 top
TP1019  TEST  [TEST]  93,33.4 270 top
TP1021  TEST  [TEST]  40.7,38.2 90 top
TP1023  TEST  [TEST]  82.9,35 270 top
TP1025  TEST  [TEST]  30.6,36.6 90 top
TP1027  TEST  [TEST]  92.4,34.2 270 top
TP1028  TEST  [TEST]  40.1,37.4 90 top
TP1030  TEST  [TEST]  83.5,35.8 270 top
TP1032  TEST  [TEST]  93,35 270 top
TP1034  TEST  [TEST]  82.9,36.6 270 top
TP1035  TEST  [TEST]  40.1,40.6 90 top
TP1037  TEST  [TEST]  93,36.6 270 top
TP1038  TEST  [TEST]  31.2,40.6 90 top
TP1040  TEST  [TEST]  82.9,38.2 270 top
TP1041  TEST  [TEST]  40.7,39.8 90 top
TP1043  TEST  [TEST]  92.4,37.4 270 top
TP1044  TEST  [TEST]  30.6,39.8 90 top
TP1046  TEST  [TEST]  83.5,39 270 top
TP1048  TEST  [TEST]  93,38.2 270 top
TP1050  TEST  [TEST]  82.9,39.8 270 top
TP1051  TEST  [TEST]  30.6,41.4 90 top
TP1054  TEST  [TEST]  30.6,43 90 top
TP1057  TEST  [TEST]  40.7,41.4 90 top
TP1060  TEST  [TEST]  40.7,43 90 top
TP1069  TEST  [TEST]  40.7,44.6 90 top
TP1072  TEST  [TEST]  40.1,43.8 90 top
TP1073  TEST  [TEST]  92.4,24.6 90 top
TP1076  TEST  [TEST]  30.6,44.6 90 top
TP1077  TEST  [TEST]  82.9,23.8 90 top
TP1080  TEST  [TEST]  31.2,43.8 90 top
TP1081  TEST  [TEST]  93,23.8 90 top
TP1083  TEST  [TEST]  40.7,23.8 90 top
TP1084  TEST  [TEST]  80.2,22.2 90 top
TP1089  TEST  [TEST]  40.7,46.2 90 top
TP1091  TEST  [TEST]  31.2,24.6 90 top
TP1092  TEST  [TEST]  82.9,33.4 90 top
TP1094  TEST  [TEST]  82.9,31.8 90 top
TP1096  TEST  [TEST]  40.1,47 90 top
TP1097  TEST  [TEST]  83.5,31 90 top
TP1099  TEST  [TEST]  40.7,25.4 90 top
TP1100  TEST  [TEST]  82.9,30.2 90 top
TP1102  TEST  [TEST]  30.6,25.4 90 top
TP1104  TEST  [TEST]  40.7,27 90 top
TP1105  TEST  [TEST]  31.2,45.4 90 top
TP1106  TEST  [TEST]  83.5,24.6 90 top
TP1108  TEST  [TEST]  31.2,26.2 90 top
TP1109  TEST  [TEST]  30.6,46.2 90 top
TP1110  TEST  [TEST]  82.9,25.4 90 top
TP1111  TEST  [TEST]  40.1,27.8 90 top
TP1112  TEST  [TEST]  93,27 90 top
TP1113  TEST  [TEST]  30.6,27 90 top
TP1114  TEST  [TEST]  92.4,27.8 90 top
TP1116  TEST  [TEST]  40.7,28.6 90 top
TP1117  TEST  [TEST]  40.7,47.8 90 top
TP1118  TEST  [TEST]  93,28.6 90 top
TP1120  TEST  [TEST]  30.6,28.6 90 top
TP1121  TEST  [TEST]  30.6,47.8 90 top
TP1122  TEST  [TEST]  83.5,26.2 90 top
TP1124  TEST  [TEST]  31.2,48.6 90 top
TP1125  TEST  [TEST]  82.9,27 90 top
TP1127  TEST  [TEST]  40.7,49.4 90 top
TP1128  TEST  [TEST]  93,30.2 90 top
TP1129  TEST  [TEST]  82.9,52.6 90 top
TP1131  TEST  [TEST]  92.4,31 90 top
TP1134  TEST  [TEST]  93,31.8 90 top
TP1137  TEST  [TEST]  83.5,29.4 90 top
TP1140  TEST  [TEST]  93,25.4 90 top
TP1142  TEST  [TEST]  82.9,28.6 90 top
TP1144  TEST  [TEST]  82.9,51 90 top
TP1146  TEST  [TEST]  83.5,50.2 90 top
TP1148  TEST  [TEST]  92.9,59 90 top
TP1151  TEST  [TEST]  83.5,58.2 90 top
TP1152  TEST  [TEST]  82.9,49.4 90 top
TP1154  TEST  [TEST]  92.9,57.4 90 top
TP1156  TEST  [TEST]  82.9,57.4 90 top
TP1158  TEST  [TEST]  40.7,36.6 90 top
TP1160  TEST  [TEST]  82.9,59.8 90 top
TP1161  TEST  [TEST]  31.2,35.8 90 top
TP1162  TEST  [TEST]  40.7,35.4 90 top
TP1163  TEST  [TEST]  30.6,35 90 top
TP1165  TEST  [TEST]  40.7,59 90 top
TP1166  TEST  [TEST]  31.2,59 90 top
TP1167  TEST  [TEST]  92.9,70.2 90 top
TP1169  TEST  [TEST]  40.1,59.8 90 top
TP1171  TEST  [TEST]  30.6,59.8 90 top
TP1179  TEST  [TEST]  40.1,82.2 90 top
TP1181  TEST  [TEST]  31.2,80.6 90 top
TP1183  TEST  [TEST]  40.7,81.4 90 top
TP1184  TEST  [TEST]  31.2,82.2 90 top
TP1186  TEST  [TEST]  30.6,79.8 90 top
TP1187  TEST  [TEST]  40.7,83 90 top
TP1189  TEST  [TEST]  40.7,79.8 90 top
TP1190  TEST  [TEST]  30.6,83 90 top
TP1192  TEST  [TEST]  30.6,78.2 90 top
TP1193  TEST  [TEST]  40.1,79 90 top
TP1194  TEST  [TEST]  30.6,81.4 90 top
TP1196  TEST  [TEST]  31.2,77.4 90 top
TP1199  TEST  [TEST]  40.7,78.2 90 top
TP1202  TEST  [TEST]  30.6,76.6 90 top
TP1205  TEST  [TEST]  40.7,76.6 90 top
TP1208  TEST  [TEST]  31.2,75.8 90 top
TP1210  TEST  [TEST]  40.1,75.8 0 top
TP1212  TEST  [TEST]  30.6,75 90 top
TP1214  TEST  [TEST]  40.7,75 90 top
TP1216  TEST  [TEST]  30.6,73.4 90 top
TP1217  TEST  [TEST]  40.7,73.4 90 top
TP1218  TEST  [TEST]  31.2,72.6 90 top
TP1219  TEST  [TEST]  40.1,72.6 90 top
TP1220  TEST  [TEST]  30.6,71.8 90 top
TP1221  TEST  [TEST]  40.7,71.8 90 top
TP1222  TEST  [TEST]  31.2,71 90 top
TP1223  TEST  [TEST]  40.7,70.2 90 top
TP1224  TEST  [TEST]  30.6,70.2 90 top
TP1225  TEST  [TEST]  92.79,83.77 90 top
TP1226  TEST  [TEST]  92.79,86.33 90 top
TP1227  TEST  [TEST]  102.1,55.7 90 top
TP1228  TEST  [TEST]  102.1,57.7 180 top
TP1229  TEST  [TEST]  1.2,1.2 0 top
TP1230  TEST  [TEST]  61.8,45.4 0 top
TP1231  TEST  [TEST]  1.2,95.5 0 top
TP1232  TEST  [TEST]  112.6,95.5 0 top
TP1233  TEST  [TEST]  112.6,1.2 0 top
TP1234  TEST  [TEST]  2,71 0 top
TP1235  TEST  [TEST]  23.6,71 0 top
TVS1000  TVS-0603  [0603-B-NOSILK-DIODE]  18.9,31 180 top
U1000  LT4619  [LT4619]  12.6,64 180 top
U1001  MAX5902AAETT  [SOT23-6]  17.6,40 0 top
U1002  TLV3012AIDBVT  [SOT23-6]  13.2,47.6 90 top
U1003  TLV3012AIDBVT  [SOT23-6]  6,43.7 90 top
U1004  [USB_PWR_SWT_SOP]  10.8,8.8 0 top
U1005  TUSB1106TSSOP  [USB_TRANCEIVER]  48.4,32.2 270 top
U1006  TUSB1106TSSOP  [USB_TRANCEIVER]  51.3,21.4 270 top
U1007  NC7NP14  [MICROPAK-8]  54.1,49.4 0 top
U1008  SN65HVD235  [DR-PDSO-G8]  47.1,48.9 270 top
U1009  SN74LVC2G80DCT  [DCT-SSOP]  95.3,72.1 0 top
U1010  SN74LS92D  [TI-D-SSOIC]  97.4,83.8 90 top
U1011  SN65220DBV  [SOT23-6L]  18.8,17.8 90 top
U1012  74LS244DW  [SO20W]  72.1,78.6 90 top
X1000  IDE_CON_D  [IDE_CON_P]  106,25.7 90 top

## Library data of the parts
C1000 C1002-C1004 C1006 C1007 C1009-C1013 C1018-C1021 C1028-C1036 C1039-C1046 R1000-R1008 R1012 R1013 R1015-R1017 R1019-R1042 R1045-R1047 R1049-R1069 R1094-R1100 R1103-R1111 = rcl_custom
C1001 C1005 C1008 C1017 C1038 = rcl
D1000 D1001 D1003 D1004 = diode-0603
F1000 = custom
J1001 = rocketbus
J1002 = usb-connector
J1003 = con-molex
J1006 TP1000-TP1005 TP1007-TP1011 TP1015 TP1017 TP1019 TP1021 TP1023 TP1025 TP1027 TP1028 TP1030 TP1032 TP1034 TP1035 TP1037 TP1038 TP1040 TP1041 TP1043 TP1044 TP1046 TP1048 TP1050 TP1051 TP1054 TP1057 TP1060 TP1069 TP1072 TP1073 TP1076 TP1077 TP1080 TP1081 TP1083 TP1084 TP1089 TP1091 TP1092 TP1094 TP1096 TP1097 TP1099 TP1100 TP1102 TP1104-TP1106 TP1108-TP1114 TP1116-TP1118 TP1120-TP1122 TP1124 TP1125 TP1127-TP1129 TP1131 TP1134 TP1137 TP1140 TP1142 TP1144 TP1146 TP1148 TP1151 TP1152 TP1154 TP1156 TP1158 TP1160-TP1163 TP1165-TP1167 TP1169 TP1171 TP1179 TP1181 TP1183 TP1184 TP1186 TP1187 TP1189 TP1190 TP1192-TP1194 TP1196 TP1199 TP1202 TP1205 TP1208 TP1210 TP1212 TP1214 TP1216-TP1235 = tqm
J1007 J1008 = 1_10_CON
L1000 = choke
LED1002 Q1001-Q1006 = Tova
LED1003-LED1010 LED11011 = led
MT1-MT6 = mount
Q1000 = ZXMP6A17
TVS1000 = tvs-0603
U1000 = LT4619
U1001-U1003 = node4
U1004 = usb power switch
U1005 U1006 = TUSB1106
U1007 = 0kaz
U1008 = can-transceiver
U1009 = sn74lvc2g80
U1010 = SN74LS92
U1011 = sn65220
U1012 = 74xx-us
X1000 = IDE_CON

## Nets
!ATA_DACK: J1006.X1_104 R1099.2
!ATA_IOR: J1006.X1_100 R1096.1
!ATA_IOW: J1006.X1_101 R1056.2
!ATA_RESET: J1006.X1_107 R1047.2
!CS0: J1006.X3_32 TP1099.P$1
!CS1: J1006.X3_31 TP1102.P$1
!FAULT: J1006.X3_41 R1012.1 U1004.4
!HRESET: J1003.11 J1006.X3_3
!JCPU_JTAG_TRST: J1003.5 J1006.X3_11
!LP_CS4: J1006.X1_110 R1097.1
!LP_CS5: J1006.X1_108 R1068.1
!OE: J1006.X3_53 U1005.3
!PO_RESET: J1003.13 J1006.X3_5
!RESIN: J1003.14 J1006.X3_4
!SRESET: J1003.12 J1006.X3_6
+3V3: C1007.1 C1008.+ C1019.2 C1021.2 C1028.1 C1030.1 C1031.2 C1035.1 C1036.1 C1038.+ C1039.2 C1040.1 C1041.2 C1044.1 C1046.1 J1003.1 J1006.X1_1 J1006.X1_13 J1006.X1_25 J1006.X1_37 J1006.X1_49 J1006.X1_61 J1006.X1_73 J1006.X1_85 J1006.X1_97 J1006.X1_109 J1006.X1_119 J1006.X2_1 J1006.X2_13 J1006.X2_25 J1006.X2_37 J1006.X2_39 J1006.X3_1 J1006.X3_13 J1006.X3_25 J1006.X3_37 J1006.X3_49 J1006.X3_61 J1006.X3_73 J1006.X3_85 J1006.X3_97 J1006.X3_109 J1006.X3_119 J1006.X4_1 J1006.X4_13 J1006.X4_25 J1006.X4_37 J1006.X4_39 J1007.1 Q1006.2 R1005.2 R1012.2 R1037.2 R1038.2 R1039.2 R1041.2 R1105.1 TP1235.P$1 U1000.A1 U1000.A2 U1000.A3 U1000.B1 U1000.B2 U1000.B3 U1000.C1 U1000.C2 U1000.C3 U1000.D1 U1000.D2 U1000.D3 U1005.9 U1005.15 U1005.16 U1006.9 U1006.15 U1006.16 U1007.8 U1008.3 U1009.8 U1012.20 X1000.41 X1000.42
+5V: C1000.2 C1001.+ C1017.+ C1032.2 C1043.1 C1045.1 D1003.ANODE D1004.ANODE R1006.2 TP1234.P$1 U1000.A10 U1000.A11 U1000.A12 U1000.B10 U1000.B11 U1000.B12 U1000.C10 U1000.C11 U1000.C12 U1000.D10 U1000.D11 U1000.D12 U1004.1 U1010.5
ACT_SIGNAL: Q1006.1 R1105.2 X1000.39
AGND: C1002.2 C1009.2 R1000.1 R1001.1 R1069.2 U1000.H6 U1000.H7 U1000.J6 U1000.J7
ATA_DRQ: J1006.X1_105 R1042.2 R1055.2
ATA_INTRQ: J1006.X1_102 R1098.2 R1106.2
ATA_IOCHRDY: J1006.X1_103 R1041.1 R1100.2
BIN: F1000.1 L1000.3
CAN1_H: J1001.CAN_H@1 J1001.CAN_H@2 R1025.2 U1008.7
CAN1_L: J1001.CAN_L@1 J1001.CAN_L@2 R1025.1 U1008.6
CHASSIS: C1042.1 J1001.CHASSIS@1 J1001.CHASSIS@2 R1004.1
COMP1: TP1003.P$1 U1000.L7
COMP2: TP1005.P$1 U1000.L6
CPU_JTAG_TCK: J1003.8 J1006.X3_14
CPU_JTAG_TDI: J1003.4 J1006.X3_9
CPU_JTAG_TDO: J1003.2 J1006.X3_8
CPU_JTAG_TMS: J1003.3 J1006.X3_7
DISABLE-CAN: D1001.ANODE J1006.X3_54
DOMINANT_BIT_STUCK_WHEN_HIGH: C1029.1 D1000.ANODE R1021.1 U1007.2
EN: J1006.X3_46 R1111.2 U1004.3
ETH_0: J1006.X1_24 J1007.2
ETH_1: J1006.X1_21 J1007.3
ETH_2: J1006.X1_22 J1007.4
ETH_3: J1006.X1_19 J1007.5
ETH_4: J1006.X1_20 J1007.6
ETH_5: J1006.X1_17 J1007.7
ETH_6: J1006.X1_16 J1007.8
ETH_7: J1006.X1_15 J1007.9
ETH_8: J1006.X1_14 J1007.10
ETH_9: J1006.X1_11 J1008.1
ETH_10: J1006.X1_12 J1008.2
ETH_11: J1006.X1_9 J1008.3
ETH_12: J1006.X1_8 J1008.4
ETH_13: J1006.X1_7 J1008.5
ETH_14: J1006.X1_6 J1008.6
ETH_15: J1006.X1_5 J1008.7
ETH_16: J1006.X1_4 J1008.8
ETH_17: J1006.X1_3 J1008.9
EXT_AD0: J1006.X1_92 R1054.2
EXT_AD1: J1006.X1_89 R1053.2
EXT_AD2: J1006.X1_88 R1052.2
EXT_AD3: J1006.X1_87 R1051.2
EXT_AD4: J1006.X1_86 R1050.2
EXT_AD5: J1006.X1_83 R1049.2
EXT_AD6: J1006.X1_84 R1057.1
EXT_AD7: J1006.X1_81 R1058.1
EXT_AD8: J1006.X1_80 R1059.1
EXT_AD9: J1006.X1_79 R1060.1
EXT_AD10: J1006.X1_78 R1061.1
EXT_AD11: J1006.X1_77 R1062.1
EXT_AD12: J1006.X1_76 R1063.1
EXT_AD13: J1006.X1_75 R1064.1
EXT_AD14: J1006.X1_72 R1065.1
EXT_AD15: J1006.X1_71 R1066.1
EXT_AD16: J1006.X1_70 R1095.1
EXT_AD17: J1006.X1_69 R1094.1
EXT_AD18: J1006.X1_68 R1067.1
EXTVCC: TP1001.P$1 U1000.J4
FREQ: TP1000.P$1 U1000.J8
GND: C1001.- C1003.2 C1004.2 C1005.- C1006.1 C1008.- C1010.1 C1012.1 C1017.- C1018.2 C1019.1 C1020.2 C1021.1 C1028.2 C1029.2 C1030.2 C1031.1 C1032.1 C1033.1 C1034.1 C1035.2 C1036.2 C1038.- C1039.1 C1040.2 C1041.1 C1042.2 C1043.2 C1044.2 C1045.2 C1046.2 J1002.B-@7 J1002.B-@8 J1003.15 J1003.16 J1006.X1_2 J1006.X1_10 J1006.X1_18 J1006.X1_26 J1006.X1_34 J1006.X1_42 J1006.X1_50 J1006.X1_58 J1006.X1_66 J1006.X1_74 J1006.X1_82 J1006.X1_90 J1006.X1_98 J1006.X1_106 J1006.X1_114 J1006.X1_120 J1006.X2_2 J1006.X2_6 J1006.X2_14 J1006.X2_22 J1006.X2_30 J1006.X2_38 J1006.X2_40 J1006.X3_2 J1006.X3_10 J1006.X3_18 J1006.X3_26 J1006.X3_34 J1006.X3_42 J1006.X3_50 J1006.X3_58 J1006.X3_66 J1006.X3_74 J1006.X3_82 J1006.X3_90 J1006.X3_98 J1006.X3_106 J1006.X3_114 J1006.X3_120 J1006.X4_2 J1006.X4_6 J1006.X4_14 J1006.X4_22 J1006.X4_30 J1006.X4_38 J1006.X4_40 J1008.10 L1000.2 LED1003.C LED1004.C LED1005.C LED1006.C LED1007.C LED1008.C LED1009.C LED1010.C LED11011.C Q1001.2 Q1002.2 Q1003.2 Q1004.2 Q1005.2 R1004.2 R1007.1 R1008.1 R1013.2 R1015.1 R1022.1 R1026.2 R1040.1 R1042.1 R1045.1 R1069.1 R1104.1 R1106.1 R1107.1 R1108.1 R1109.2 R1110.2 R1111.1 TP1229.P$1 TP1230.P$1 TP1231.P$1 TP1232.P$1 TP1233.P$1 TVS1000.CATHODE U1000.A4 U1000.A5 U1000.A6 U1000.A7 U1000.A8 U1000.A9 U1000.B4 U1000.B5 U1000.B6 U1000.B7 U1000.B8 U1000.B9 U1000.C4 U1000.C5 U1000.C6 U1000.C7 U1000.C8 U1000.C9 U1000.D4 U1000.D5 U1000.D6 U1000.D7 U1000.D8 U1000.D9 U1000.E1 U1000.E2 U1000.E3 U1000.E4 U1000.E5 U1000.E6 U1000.E7 U1000.E8 U1000.E9 U1000.E10 U1000.E11 U1000.E12 U1000.F1 U1000.F2 U1000.F3 U1000.F4 U1000.F5 U1000.F7 U1000.F8 U1000.F9 U1000.F10 U1000.F11 U1000.F12 U1000.G1 U1000.G2 U1000.G3 U1000.G4 U1000.G5 U1000.G6 U1000.G7 U1000.G8 U1000.G9 U1000.G10 U1000.G11 U1000.G12 U1000.H1 U1000.H2 U1000.H4 U1000.H9 U1000.H11 U1000.H12 U1001.4 U1002.2 U1003.2 U1004.2 U1005.8 U1006.8 U1007.4 U1008.2 U1009.4 U1010.6 U1010.7 U1010.10 U1011.2 U1011.5 U1012.1 U1012.10 U1012.19 X1000.2 X1000.19 X1000.22 X1000.24 X1000.26 X1000.30 X1000.40 X1000.43
GPIO24: J1006.X2_7 U1012.2
GPIO25: J1006.X2_8 U1012.4
GPIO26: J1006.X2_9 U1012.6
GPIO27: J1006.X2_10 U1012.8
GPIO28: J1006.X2_11 Q1005.1
GPIO46: J1006.X2_12 Q1004.1
GPIO47: J1006.X2_15 Q1003.1
GPIO48: J1006.X2_16 U1012.11
GPIO49: J1006.X2_17 U1012.13
GPIO50: J1006.X2_18 U1012.15
GPIO51: J1006.X2_19 U1012.17
ILIM: R1013.1 U1004.5
IN+: C1013.1 R1006.1 R1008.2 U1003.3
IN+1: C1011.1 R1005.1 R1007.2 U1002.3
INTVCC: TP1002.P$1 U1000.F6
INV-INV: R1024.1 U1007.5 U1007.6
INV_DATA: D1000.CATHODE R1021.2 U1007.1
MAX5902DRAIN: Q1001.3 Q1002.3 R1003.1 U1001.2
N$1: TP1225.P$1 U1010.11
N$2: R1033.1 U1012.9
N$3: J1006.X1_91 TP1152.P$1
N$4: J1006.X4_31 TP1194.P$1
N$5: TP1226.P$1 U1010.9
N$6: C1020.1 J1002.CHASSIS@1 J1002.CHASSIS@2 R1015.2
N$7: R1034.1 U1012.7
N$9: R1040.2 X1000.28
N$10: J1006.X4_35 TP1190.P$1
N$11: J1006.X4_36 TP1187.P$1
N$14: J1006.X4_33 TP1184.P$1
N$19: J1006.X4_34 TP1179.P$1
N$21: J1006.X4_29 TP1181.P$1
N$22: J1006.X4_32 TP1183.P$1
N$23: J1006.X4_27 TP1186.P$1
N$24: J1006.X3_84 TP1089.P$1
N$25: J1006.X4_28 TP1189.P$1
N$26: J1006.X4_23 TP1192.P$1
N$27: J1006.X4_26 TP1193.P$1
N$28: J1006.X4_21 TP1196.P$1
N$29: J1006.X4_24 TP1199.P$1
N$30: J1006.X4_19 TP1202.P$1
N$31: Q1000.DRAIN R1002.1
N$32: R1016.1 U1005.12
N$33: R1017.1 U1005.11
N$34: J1006.X4_20 TP1205.P$1
N$35: J1006.X4_17 TP1208.P$1
N$36: J1006.X4_18 TP1210.P$1
N$37: LED1003.A R1029.2
N$40: U1003.4 U1003.5
N$41: J1006.X4_15 TP1212.P$1
N$42: J1006.X4_16 TP1214.P$1
N$43: J1006.X4_11 TP1216.P$1
N$44: J1006.X4_12 TP1217.P$1
N$45: J1006.X4_9 TP1218.P$1
N$46: J1006.X4_10 TP1219.P$1
N$47: U1009.2 U1009.5 U1009.7
N$48: R1023.2 U1007.3
N$49: J1006.X4_7 TP1220.P$1
N$50: J1006.X4_8 TP1221.P$1
N$51: J1006.X4_5 TP1222.P$1
N$52: J1006.X4_4 TP1223.P$1
N$53: J1006.X4_3 TP1224.P$1
N$54: J1006.X3_117 TP1171.P$1
N$55: J1006.X3_118 TP1169.P$1
N$56: J1006.X3_115 TP1166.P$1
N$57: J1006.X3_116 TP1165.P$1
N$58: R1103.1 R1104.2 U1001.6
N$59: TP1008.P$1 U1001.5
N$60: U1009.3 U1009.6 U1010.14
N$61: U1010.1 U1010.12
N$62: D1001.CATHODE R1023.1 R1024.2 U1008.5
N$63: LED1004.A R1030.2
N$68: LED1005.A R1031.2
N$69: LED1006.A R1032.2
N$70: LED1007.A R1033.2
N$71: LED1008.A R1034.2
N$72: LED1009.A R1035.2
N$73: LED1010.A R1036.2
N$74: LED1002.4 R1039.1
N$75: LED1002.1 R1037.1
N$76: J1006.X3_88 TP1117.P$1
N$77: J1006.X3_87 TP1121.P$1
N$78: J1006.X3_89 TP1124.P$1
N$79: J1006.X3_92 TP1127.P$1
N$80: J1006.X3_83 TP1109.P$1
N$81: J1006.X3_81 TP1105.P$1
N$82: LED1002.3 R1038.1
N$83: LED1002.5 Q1005.3
N$84: J1006.X3_86 TP1096.P$1
N$85: J1006.X3_77 TP1080.P$1
N$86: J1006.X3_79 TP1076.P$1
N$87: J1006.X3_78 TP1072.P$1
N$88: J1006.X3_80 TP1069.P$1
N$89: J1006.X3_76 TP1060.P$1
N$90: LED1002.2 Q1004.3
N$91: J1006.X3_75 TP1054.P$1
N$92: LED1002.6 Q1003.3
N$93: J1006.X3_67 TP1044.P$1
N$94: J1006.X3_68 TP1041.P$1
N$95: J1006.X3_69 TP1038.P$1
N$96: J1006.X3_70 TP1035.P$1
N$97: J1006.X3_62 TP1028.P$1
N$98: J1006.X3_59 TP1025.P$1
N$99: J1006.X3_64 TP1021.P$1
N$100: Q1006.3 R1046.2
N$101: R1035.1 U1012.5
N$102: TP1228.P$1 X1000.34
N$103: R1036.1 U1012.3
N$104: R1029.1 U1012.18
N$105: R1030.1 U1012.16
N$106: J1006.X3_28 TP1083.P$1
N$107: J1006.X3_29 TP1091.P$1
N$108: J1006.X3_36 TP1104.P$1
N$109: J1006.X3_33 TP1108.P$1
N$110: J1006.X3_38 TP1111.P$1
N$111: J1006.X3_35 TP1113.P$1
N$112: J1006.X3_40 TP1116.P$1
N$113: J1006.X3_39 TP1120.P$1
N$114: R1031.1 U1012.14
N$115: TP1227.P$1 X1000.32
N$116: R1032.1 U1012.12
N$117: R1098.1 X1000.31
N$118: LED11011.A R1046.1
N$119: R1097.2 X1000.37
N$120: U1002.4 U1002.5
N$121: R1096.2 X1000.25
N$122: R1047.1 X1000.1
N$124: J1006.X3_56 TP1162.P$1
N$125: J1006.X3_55 TP1163.P$1
N$126: J1006.X1_53 TP1015.P$1
N$127: J1006.X1_52 TP1019.P$1
N$128: J1006.X1_55 TP1023.P$1
N$129: J1006.X1_54 TP1027.P$1
N$130: J1006.X1_57 TP1030.P$1
N$131: J1006.X1_56 TP1032.P$1
N$132: J1006.X1_59 TP1034.P$1
N$133: J1006.X1_60 TP1037.P$1
N$134: J1006.X1_63 TP1040.P$1
N$135: J1006.X1_62 TP1043.P$1
N$136: J1006.X1_65 TP1046.P$1
N$137: J1006.X1_64 TP1048.P$1
N$138: J1006.X1_67 TP1050.P$1
N$139: R1045.2 R1058.2 X1000.3
N$140: J1006.X1_99 TP1129.P$1
N$141: J1006.X1_95 TP1144.P$1
N$142: J1006.X1_93 TP1146.P$1
N$146: J1006.X1_117 TP1160.P$1
N$147: R1100.1 X1000.27
N$163: R1055.1 X1000.21
N$164: R1049.1 X1000.7
N$165: R1054.1 X1000.17
N$166: R1053.1 X1000.15
N$167: R1052.1 X1000.13
N$168: R1051.1 X1000.11
N$169: R1050.1 X1000.9
N$170: R1057.2 X1000.5
N$171: R1059.2 X1000.4
N$172: R1060.2 X1000.6
N$173: R1061.2 X1000.8
N$176: R1062.2 X1000.10
N$177: R1063.2 X1000.12
N$178: R1064.2 X1000.14
N$179: J1006.X1_111 TP1156.P$1
N$180: J1006.X1_112 TP1154.P$1
N$181: J1006.X1_113 TP1151.P$1
N$182: J1006.X1_116 TP1148.P$1
N$183: J1006.X1_39 TP1142.P$1
N$184: J1006.X1_32 TP1140.P$1
N$185: J1006.X1_41 TP1137.P$1
N$186: J1006.X1_48 TP1134.P$1
N$187: J1006.X1_46 TP1131.P$1
N$188: J1006.X1_44 TP1128.P$1
N$189: J1006.X1_35 TP1125.P$1
N$190: J1006.X1_33 TP1122.P$1
N$191: J1006.X1_40 TP1118.P$1
N$192: J1006.X1_38 TP1114.P$1
N$193: J1006.X1_36 TP1112.P$1
N$194: J1006.X1_31 TP1110.P$1
N$195: J1006.X1_29 TP1106.P$1
N$196: J1006.X1_43 TP1100.P$1
N$197: J1006.X1_45 TP1097.P$1
N$198: J1006.X1_47 TP1094.P$1
N$199: J1006.X1_51 TP1092.P$1
N$200: J1006.X1_23 TP1084.P$1
N$201: J1006.X1_28 TP1081.P$1
N$202: J1006.X1_27 TP1077.P$1
N$203: J1006.X1_30 TP1073.P$1
N$213: R1019.1 U1006.12
N$214: R1020.1 U1006.11
N$215: R1065.2 X1000.16
N$216: R1066.2 X1000.18
N$217: R1099.1 X1000.29
N$219: R1094.2 X1000.33
N$220: R1095.2 X1000.35
N$224: R1067.2 X1000.36
N$225: R1068.2 X1000.38
N$229: R1056.1 X1000.23
N_GATE_3V3: C1011.2 Q1002.1 U1002.1
N_GATE_5V: C1013.2 Q1001.1 U1003.1
P_GATE: Q1000.GATE U1001.3
PGOOD: TP1009.P$1 U1000.H5
PSC2_0: J1006.X3_60 TP1158.P$1 U1008.4
PSC2_1: J1006.X3_57 TP1161.P$1 U1007.7 U1008.1
PWR: J1001.B+@1 J1001.B+@2 L1000.4
RCV: J1006.X3_47 U1005.4
RS232_RXD_1: J1006.X3_71 R1027.1 TP1051.P$1 U1011.6
RS232_TXD_1: J1006.X3_72 R1028.1 TP1057.P$1 U1011.4
RUN1: TP1004.P$1 U1000.J9
RUN2: TP1007.P$1 U1000.J5
SH_GND: J1001.B-@1 J1001.B-@2 L1000.1
SLOPECONTROL: R1022.2 U1008.8
SM501_CLKOF: J1006.X2_4 TP1167.P$1 U1009.1
SOFTCON: J1006.X3_65 U1005.2
SPEED: J1006.X3_43 U1005.10
SPS-500KHZ: R1026.1 U1000.H8 U1010.8
SUSPND: J1006.X3_44 U1005.7
SW1: TP1011.P$1 U1000.H10
SW2: TP1010.P$1 U1000.H3
TEST_MODE0: J1003.9 J1006.X3_17
TEST_MODE1: J1003.10 J1006.X3_15
TEST_SEL_0: J1003.6 J1006.X3_16
TEST_SEL_1: J1003.7 J1006.X3_12
TK-SS1: C1002.1 U1000.K8
TK-SS2: C1009.1 U1000.K5
TLV-3V-VCC: C1010.2 D1003.CATHODE U1002.6
TLV-5V-VCC: C1012.2 D1004.CATHODE U1003.6
UART_RXD: C1033.2 J1001.AUX_1@1 J1001.AUX_1@2 R1027.2
UART_TXD: C1034.2 J1001.AUX_2@1 J1001.AUX_2@2 R1028.2
USB1_!OE: J1006.X3_20 U1006.3
USB1_D+: J1001.USB_H@1 J1001.USB_H@2 R1019.2 R1110.1
USB1_D-: J1001.USB_L@1 J1001.USB_L@2 R1020.2 R1109.1
USB1_RCV: J1006.X3_21 U1006.4
USB1_SOFTCON: J1006.X3_63 TP1017.P$1 U1006.2
USB1_SPEED: J1006.X3_27 U1006.10
USB1_SUSPND: J1006.X3_30 U1006.7
USB1_VM: J1006.X3_23 U1006.6
USB1_VMO: J1006.X3_19 U1006.14
USB1_VP: J1006.X3_24 U1006.5
USB1_VPO: J1006.X3_22 U1006.13
USB2_D+: J1002.USB_H@3 J1002.USB_H@4 R1016.2 R1108.2
USB2_D-: J1002.USB_L@5 J1002.USB_L@6 R1017.2 R1107.2
VBUS: C1018.1 J1002.B+@1 J1002.B+@2 U1004.6
VFB1: C1000.1 R1000.2 U1000.K7
VFB2: C1007.2 R1001.2 U1000.K6
VIN: C1003.1 C1004.1 R1002.2 R1003.2 U1000.J1 U1000.J2 U1000.J3 U1000.J10 U1000.J11 U1000.J12 U1000.K1 U1000.K2 U1000.K3 U1000.K4 U1000.K9 U1000.K10 U1000.K11 U1000.K12 U1000.L1 U1000.L2 U1000.L3 U1000.L4 U1000.L5 U1000.L8 U1000.L9 U1000.L10 U1000.L11 U1000.L12 U1000.M1 U1000.M2 U1000.M3 U1000.M4 U1000.M5 U1000.M6 U1000.M7 U1000.M8 U1000.M9 U1000.M10 U1000.M11 U1000.M12
VM: J1006.X3_45 U1005.6
VMO: J1006.X3_51 U1005.14
VP: J1006.X3_48 U1005.5
VPO: J1006.X3_52 U1005.13
VS: C1005.+ C1006.2 F1000.2 Q1000.SOURCE R1103.2 TVS1000.ANODE U1001.1